# EAGLE board CT_schematic (EAGLE 7.6.0)

Size 100 x 80 mm. Coordinates in mm from the lower left corner, seen from the top.
Outline: 0,0 100,0 100,80 0,80 0,0
Copper layers (1*16): Top 0.035mm / dielectric 1.5mm / Bottom 0.035mm
Design rules "default": minimum track width 10mil, minimum drill 24mil, track to track 8mil, track to pad 8mil, pad to pad 8mil, via to via 8mil, smd to smd 8mil, copper to edge 40mil, drill to drill 8mil, minimum pad ring 10mil, minimum via ring 8mil, stop-mask expansion 4mil, vias tented up to drill 0mil, thermal gap 10mil

## Footprints (pad centres in the part's own frame; a part is rotated, then mirrored left to right if it is on the bottom)
C0603 = smd 0.8 x 0.8: 1 -0.762,0; 2 0.762,0
C0402 = smd 0.5 x 0.5: 1 -0.508,0; 2 0.508,0
C1206 = smd 1.3 x 1.6: 1 -1.524,0; 2 1.524,0
C0805 = smd 1.2 x 1.3: 1 -1.016,0; 2 1.016,0
C1210 = smd 1.2 x 2.5: 1 -1.524,0; 2 1.524,0
EXV-9H = smd 3.505 x 1.676: 1 -2.857,0; 2 2.857,0
L0603 = smd 0.8 x 0.8: 1 -0.762,0; 2 0.762,0
PJ-037B_PACKAGE = drill 3.7 square: 1 12,0 | drill 3.2 square: 2 6,0
R0603 = smd 0.8 x 0.8: 1 -0.762,0; 2 0.762,0
UFBGA64 = smd 0.2 x 0.2: A1 -1.75,1.75; A2 -1.25,1.75; A3 -0.75,1.75; A4 -0.25,1.75; A5 0.25,1.75; A6 0.75,1.75; A7 1.25,1.75; A8 1.75,1.75; B1 -1.75,1.25; B2 -1.25,1.25; B3 -0.75,1.25; B4 -0.25,1.25; B5 0.25,1.25; B6 0.75,1.25; B7 1.25,1.25; B8 1.75,1.25; C1 -1.75,0.75; C2 -1.25,0.75; C3 -0.75,0.75; C4 -0.25,0.75; C5 0.25,0.75; C6 0.75,0.75; C7 1.25,0.75; C8 1.75,0.75; D1 -1.75,0.25; D2 -1.25,0.25; D3 -0.75,0.25; D4 -0.25,0.25; D5 0.25,0.25; D6 0.75,0.25; D7 1.25,0.25; D8 1.75,0.25; E1 -1.75,-0.25; E2 -1.25,-0.25; E3 -0.75,-0.25; E4 -0.25,-0.25; E5 0.25,-0.25; E6 0.75,-0.25; E7 1.25,-0.25; E8 1.75,-0.25; F1 -1.75,-0.75; F2 -1.25,-0.75; F3 -0.75,-0.75; F4 -0.25,-0.75; F5 0.25,-0.75; F6 0.75,-0.75; F7 1.25,-0.75; F8 1.75,-0.75; G1 -1.75,-1.25; G2 -1.25,-1.25; G3 -0.75,-1.25; G4 -0.25,-1.25; G5 0.25,-1.25; G6 0.75,-1.25; G7 1.25,-1.25; G8 1.75,-1.25; H1 -1.75,-1.75; H2 -1.25,-1.75; H3 -0.75,-1.75; H4 -0.25,-1.75; H5 0.25,-1.75; H6 0.75,-1.75; H7 1.25,-1.75; H8 1.75,-1.75
TST-110-05-T-D-RA = drill 1 pad 1.7 square: 1 0,0 | drill 1 pad 1.7: 2 0,2.54; 3 2.54,0; 4 2.54,2.54; 5 5.08,0; 6 5.08,2.54; 7 7.62,0; 8 7.62,2.54; 9 10.16,0; 10 10.16,2.54; 11 12.7,0; 12 12.7,2.54; 13 15.24,0; 14 15.24,2.54; 15 17.78,0; 16 17.78,2.54; 17 20.32,0; 18 20.32,2.54; 19 22.86,0; 20 22.86,2.54
TSSOP20-I = smd 0.4 x 1.35: 1 -2.925,-2.875; 2 -2.275,-2.875; 3 -1.625,-2.875; 4 -0.975,-2.875; 5 -0.325,-2.875; 6 0.325,-2.875; 7 0.975,-2.875; 8 1.625,-2.875; 9 2.275,-2.875; 10 2.925,-2.875; 11 2.925,2.875; 12 2.275,2.875; 13 1.625,2.875; 14 0.975,2.875; 15 0.325,2.875; 16 -0.325,2.875; 17 -0.975,2.875; 18 -1.625,2.875; 19 -2.275,2.875; 20 -2.925,2.875
182-009-MALE = drill 1.194 pad 1.524 octagon: 1 -5.537,10.923; 2 -2.769,10.923; 3 0,10.923; 4 2.769,10.923; 5 5.537,10.923; 6 -4.153,8.08; 7 -1.384,8.08; 8 1.384,8.08; 9 4.153,8.08 | hole 3.048: -12.446,9.501; 12.446,9.501
TSC2014IYZGT = smd 0.3 x 0.3: A1 0,0; A2 0.5,0; A3 1,0; B1 0,-0.5; B2 0.5,-0.5; B3 1,-0.5; C1 0,-1; C2 0.5,-1; C3 1,-1; D1 0,-1.5; D2 0.5,-1.5; D3 1,-1.5
HTSS-105-01-G-D = drill 1 pad 1.8 square: 1 0,0 | drill 1 pad 1.8: 2 0,2.54; 3 2.54,0; 4 2.54,2.54; 5 5.08,0; 6 5.08,2.54; 7 7.62,0; 8 7.62,2.54; 9 10.16,0; 10 10.16,2.54
ASEK = smd 1.4 x 1: 1 -1.1,-0.8; 2 1.1,-0.8; 3 1.1,0.8; 4 -1.1,0.8
ASDMB-XX.XXXXMHZ-XX-XX-XXX = smd 0.65 x 0.85: 1 0.45,0.2; 2 2.05,0.2; 3 2.05,1.8; 4 0.45,1.8
WSON-8 = smd 0.3 x 0.6: 1 -0.75,0; 2 0.05,0; 3 0.85,0; 4 1.65,0; 5 1.65,3.8; 6 0.85,3.8; 7 0.05,3.8; 8 -0.75,3.8 | smd 3 x 2.6: PAD 0.45,1.9
SON-6 = smd 0.55 x 0.3: 1 -0.355,0.5 | smd 0.52 x 0.3: 2 -0.37,0; 3 -0.37,-0.5; 4 0.37,-0.5; 5 0.37,0; 6 0.37,0.5
SW_4-1437565-2 = smd 1.4 x 2.1: 1 -2.23,4.55; 2 -2.23,-4.55; 3 2.23,4.55; 4 2.23,-4.55
LGM67K-G1J2-24-Z = smd 0.8 x 1.4: A -2,0; C 0,0
NC7SZ125M5X = smd 1.3 x 0.7: 1 -1.3,0.95; 2 -1.3,0; 3 -1.3,-0.95; 4 1.3,-0.95; 5 1.3,0.95

## Placement (x,y rotation side)
C1  1e-06  [C0603]  -43.18,68.58 0 top  (outside the outline)
C2  1e-07  [C0603]  -46.99,68.58 0 top  (outside the outline)
C3  1e-07  [C0603]  -50.8,68.58 0 top  (outside the outline)
C4  1e-07  [C0603]  -54.61,68.58 0 top  (outside the outline)
C5  1e-07  [C0603]  -58.42,68.58 0 top  (outside the outline)
C6  4.7e-06  [C0603]  -39.37,68.58 0 top  (outside the outline)
C7  1e-07  [C0603]  -62.23,68.58 0 top  (outside the outline)
C8  1e-07  [C0603]  -66.04,68.58 0 top  (outside the outline)
C9  1e-08  [C0603]  -69.85,68.58 0 top  (outside the outline)
C10  1e-06  [C0603]  -73.66,68.58 0 top  (outside the outline)
C11  1e-07  [C0402]  -49.53,73.66 0 top  (outside the outline)
C12  1e-07  [C0402]  -53.34,73.66 0 top  (outside the outline)
C13  1e-07  [C0402]  -57.15,73.66 0 top  (outside the outline)
C14  1e-07  [C0402]  -60.96,73.66 0 top  (outside the outline)
C15  1e-07  [C0402]  -64.77,73.66 0 top  (outside the outline)
C16  1e-07  [C0402]  -68.58,73.66 0 top  (outside the outline)
C17  1e-07  [C0402]  -72.39,73.66 0 top  (outside the outline)
C18  1e-07  [C0402]  -76.2,73.66 0 top  (outside the outline)
C19  1e-06  [C0603]  -15.24,73.66 0 top  (outside the outline)
C20  1e-08  [C0402]  -15.24,78.74 0 top  (outside the outline)
C21  1e-08  [C0402]  -19.05,78.74 0 top  (outside the outline)
C22  1e-08  [C0402]  -22.86,78.74 0 top  (outside the outline)
C23  1e-05  [C1206]  -71.12,54.61 0 top  (outside the outline)
C24  1e-05  [C0805]  -27.94,62.23 0 top  (outside the outline)
C25  1e-06  [C0603]  -19.05,73.66 0 top  (outside the outline)
C26  1e-05  [C1210]  -64.77,55.88 0 top  (outside the outline)
C27  1e-07  [C0402]  -26.67,78.74 0 top  (outside the outline)
C28  0.0001  [EXV-9H]  -17.78,55.88 0 top  (outside the outline)
C29  0.0001  [EXV-9H]  -29.21,55.88 0 top  (outside the outline)
C30  1e-08  [C0402]  -30.48,78.74 0 top  (outside the outline)
C31  1e-08  [C0402]  -34.29,78.74 0 top  (outside the outline)
F1  240.0  [L0603]  -22.86,73.66 0 top  (outside the outline)
J1  PJ-037B  [PJ-037B_PACKAGE]  -72.39,7.62 0 top  (outside the outline)
R2  1000.0  [R0603]  -26.67,73.66 0 top  (outside the outline)
R4  4700.0  [R0603]  -30.48,73.66 0 top  (outside the outline)
R5  2200.0  [R0603]  -34.29,73.66 0 top  (outside the outline)
R6  2200.0  [R0603]  -38.1,73.66 0 top  (outside the outline)
R7  10000.0  [R0603]  -63.5,62.23 0 top  (outside the outline)
R8  10000.0  [R0603]  -68.58,62.23 0 top  (outside the outline)
R9  10000.0  [R0603]  -73.66,62.23 0 top  (outside the outline)
R10  10000.0  [R0603]  -15.24,68.58 0 top  (outside the outline)
R11  10000.0  [R0603]  -20.32,68.58 0 top  (outside the outline)
R12  100000.0  [R0603]  -33.02,62.23 0 top  (outside the outline)
R13  806.0  [R0603]  -41.91,73.66 0 top  (outside the outline)
R14  1000.0  [R0603]  -45.72,73.66 0 top  (outside the outline)
R15  100000.0  [R0603]  -38.1,62.23 0 top  (outside the outline)
R16  110000.0  [R0603]  -43.18,62.23 0 top  (outside the outline)
R17  100000.0  [R0603]  -48.26,62.23 0 top  (outside the outline)
R18  10000.0  [R0603]  -25.4,68.58 0 top  (outside the outline)
R19  10000.0  [R0603]  -30.48,68.58 0 top  (outside the outline)
R20  82000.0  [R0603]  -35.56,68.58 0 top  (outside the outline)
R21  300000.0  [R0603]  -53.34,62.23 0 top  (outside the outline)
R22  120000.0  [R0603]  -58.42,62.23 0 top  (outside the outline)
U1  STM32F078RBH6  [UFBGA64]  -24.13,39.37 0 top  (outside the outline)
U2  TST-110-05-T-D-RA  [TST-110-05-T-D-RA]  -46.99,45.72 0 top  (outside the outline)
U3  SP3203ECY-L/TR  [TSSOP20-I]  -43.18,27.94 0 top  (outside the outline)
U4  182-009-113R531  [182-009-MALE]  -41.91,6.35 0 top  (outside the outline)
U5  TSC2014IYZGT  [TSC2014IYZGT]  -59.69,55.88 0 top  (outside the outline)
U6  HTSS-105-01-G-D  [HTSS-105-01-G-D]  -62.23,26.67 0 top  (outside the outline)
U7  ASEK-2-32.768KHz-ECST  [ASEK]  -67.31,48.26 0 top  (outside the outline)
U8  ASDMB-25.000MHZ-EC-T  [ASDMB-XX.XXXXMHZ-XX-XX-XXX]  -16.51,1.27 0 top  (outside the outline)
U9  LP3878SDX-ADJ/NOPB  [WSON-8]  -44.45,36.83 0 top  (outside the outline)
U10  LP2951ACSDX/NOPB  [WSON-8]  -62.23,36.83 0 top  (outside the outline)
U11  TPS3895ADRYR  [SON-6]  -36.83,77.47 0 top  (outside the outline)
U12  4-1437565-2  [SW_4-1437565-2]  -27.94,27.94 0 top  (outside the outline)
U13  Q65110A2395  [LGM67K-G1J2-24-Z]  -39.37,55.88 0 top  (outside the outline)
U14  nc7sz125m5x  [NC7SZ125M5X]  -15.24,62.23 0 top  (outside the outline)
U15  nc7sz125m5x  [NC7SZ125M5X]  -21.59,62.23 0 top  (outside the outline)

## Library data of the parts
C1-C31 F1 J1 R2 R4-R22 U1-U15 = circuit_tree

## Nets
CLK_U1_A1: U1.A1 U7.3
CLK_U1_C1: U1.C1 U8.3
GND: C1.2 C2.2 C3.2 C4.2 C5.2 C6.2 C7.2 C8.2 C9.2 C10.2 C11.2 C12.2 C13.2 C16.2 C17.2 C18.2 C19.2 C20.2 C21.2 C22.2 C23.2 C24.2 C25.2 C26.2 C27.2 C28.2 C29.2 C30.2 C31.2 J1.2 R2.2 R7.2 R8.2 R14.2 R17.2 R20.2 R22.2 U1.C2 U1.D4 U1.D5 U1.D6 U1.F1 U2.4 U2.6 U2.8 U2.10 U2.12 U2.14 U2.16 U2.18 U2.20 U3.18 U4.5 U5.D2 U6.9 U7.2 U8.2 U9.3 U9.PAD U10.3 U10.4 U10.PAD U11.2 U13.C U14.2 U14.3 U15.1 U15.3
NET_U1_A3: R6.1 U1.A3 U5.C1
NET_U1_B3: R5.1 U1.B3 U5.D1
NET_U1_B4: R7.1 U1.B4
NET_U1_E1: R4.1 U1.E1 U15.4
NET_U1_G6: R8.1 U1.G6
NET_U1_H1: C9.1 C10.1 F1.1 U1.H1
NET_U1_H7: U13.A
NET_U1_H8: U12.3 U12.4
NET_U3_1: C14.1 U3.1
NET_U3_2: C16.1 U3.2
NET_U3_3: C14.2 U3.3
NET_U3_4: C15.1 U3.4
NET_U3_5: C15.2 U3.5
NET_U3_6: C17.1 U3.6
NET_U3_20: U3.20
NET_U4_2: U3.14 U4.2
NET_U4_3: U3.17 U4.3
NET_U4_7: U3.13 U4.7
NET_U4_8: U3.16 U4.8
NET_U5_B1: R11.1 U5.B1
NET_U5_C2: R10.1 U5.C2
NET_U6_3: U5.B3 U6.3
NET_U6_4: U5.D3 U6.4
NET_U6_5: U5.A3 U6.5
NET_U6_6: U5.C3 U6.6
NET_U9_1: C22.1 U9.1
NET_U9_6: R13.2 R14.1 U9.6
NET_U9_8: R12.1 U9.8
NET_U10_5: R15.1 U10.5
NET_U10_7: R16.2 R17.1 U10.7
NET_U11_1: R19.1 R20.1 U11.1
NET_U11_3: R21.2 R22.1 U11.3
NET_U11_4: R18.1 U11.4 U14.4 U15.2
NET_U12_1: R2.1 U12.1 U12.2
PROC_SYS_SWCLK: U1.A7 U2.9
PROC_SYS_SWDIO: U1.A8 U2.7
PROC_USART1_CTS: U1.C8 U3.8
PROC_USART1_RTS: U1.B8 U3.10
PROC_USART1_RX: U1.C3 U3.11
PROC_USART1_TX: U1.C7 U3.7
RST_OUT_U2_SRESET_B: R9.1 U2.15 U14.1
VCC_S1_6V1: C23.1 C25.1 C28.1 C29.1 J1.1 R12.2 U9.4 U10.8
VCC_TIER1_1V8: C1.1 C2.1 C3.1 C4.1 C5.1 C6.1 C7.1 C8.1 C11.1 C13.1 C18.1 C19.1 C20.1 C21.1 C24.1 C27.1 C30.1 C31.1 F1.2 R4.2 R5.2 R6.2 R9.2 R10.2 R11.2 R13.1 R18.2 R19.2 R21.1 U1.B2 U1.D2 U1.E4 U1.E5 U1.E6 U2.1 U3.12 U5.A2 U5.B2 U7.4 U8.4 U9.5 U11.6 U14.5 U15.5
VCC_TIER1_2V7: C12.1 C26.1 R15.2 R16.1 U3.19 U10.1

## Tracks (layer width: path | path; a pad name or v marks a point on that pad's centre or on a via)
CLK_U1_A1  (1 unrouted)
CLK_U1_C1  (1 unrouted)
GND  (67 unrouted)
NET_U1_A3  (2 unrouted)
NET_U1_B3  (2 unrouted)
NET_U1_B4  (1 unrouted)
NET_U1_E1  (2 unrouted)
NET_U1_G6  (1 unrouted)
NET_U1_H1  (3 unrouted)
NET_U1_H8  (1 unrouted)
NET_U3_1  (1 unrouted)
NET_U3_2  (1 unrouted)
NET_U3_3  (1 unrouted)
NET_U3_4  (1 unrouted)
NET_U3_5  (1 unrouted)
NET_U3_6  (1 unrouted)
NET_U4_2  (1 unrouted)
NET_U4_3  (1 unrouted)
NET_U4_7  (1 unrouted)
NET_U4_8  (1 unrouted)
NET_U5_B1  (1 unrouted)
NET_U5_C2  (1 unrouted)
NET_U6_3  (1 unrouted)
NET_U6_4  (1 unrouted)
NET_U6_5  (1 unrouted)
NET_U6_6  (1 unrouted)
NET_U9_1  (1 unrouted)
NET_U9_6  (2 unrouted)
NET_U9_8  (1 unrouted)
NET_U10_5  (1 unrouted)
NET_U10_7  (2 unrouted)
NET_U11_1  (2 unrouted)
NET_U11_3  (2 unrouted)
NET_U11_4  (3 unrouted)
NET_U12_1  (2 unrouted)
PROC_SYS_SWCLK  (1 unrouted)
PROC_SYS_SWDIO  (1 unrouted)
PROC_USART1_CTS  (1 unrouted)
PROC_USART1_RTS  (1 unrouted)
PROC_USART1_RX  (1 unrouted)
PROC_USART1_TX  (1 unrouted)
RST_OUT_U2_SRESET_B  (2 unrouted)
VCC_S1_6V1  (7 unrouted)
VCC_TIER1_1V8  (43 unrouted)
VCC_TIER1_2V7  (5 unrouted)